# Altium PCB SystemStatusBoard.PcbDoc
Units mm, origin at the board's own origin, x right, y up, seen from the top; angles counter-clockwise.
Board outline 78.99 x 52.2 mm, 2 copper layers (Top Layer, Bottom Layer); 67 components, 36 nets, 220 pads, 35 vias.
Unrouted connection lines stored in the file: 29.
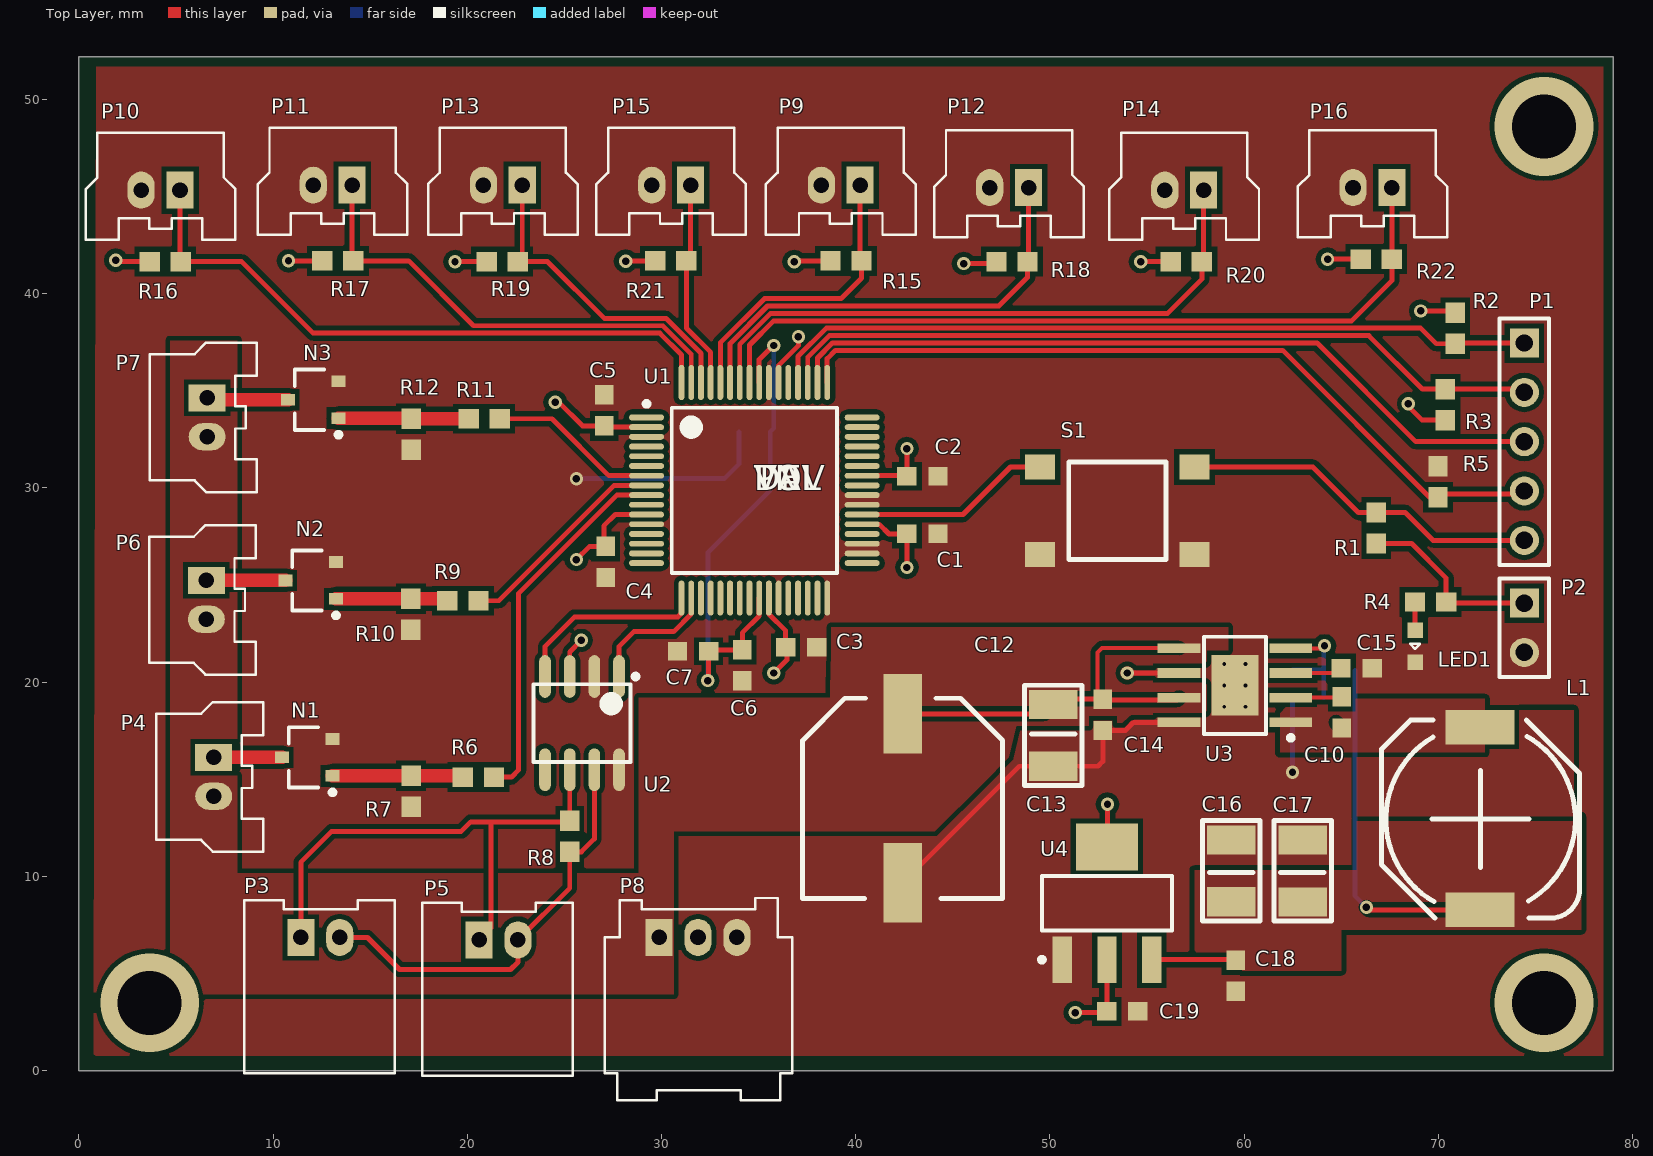
[diagram p0: Top Layer view]
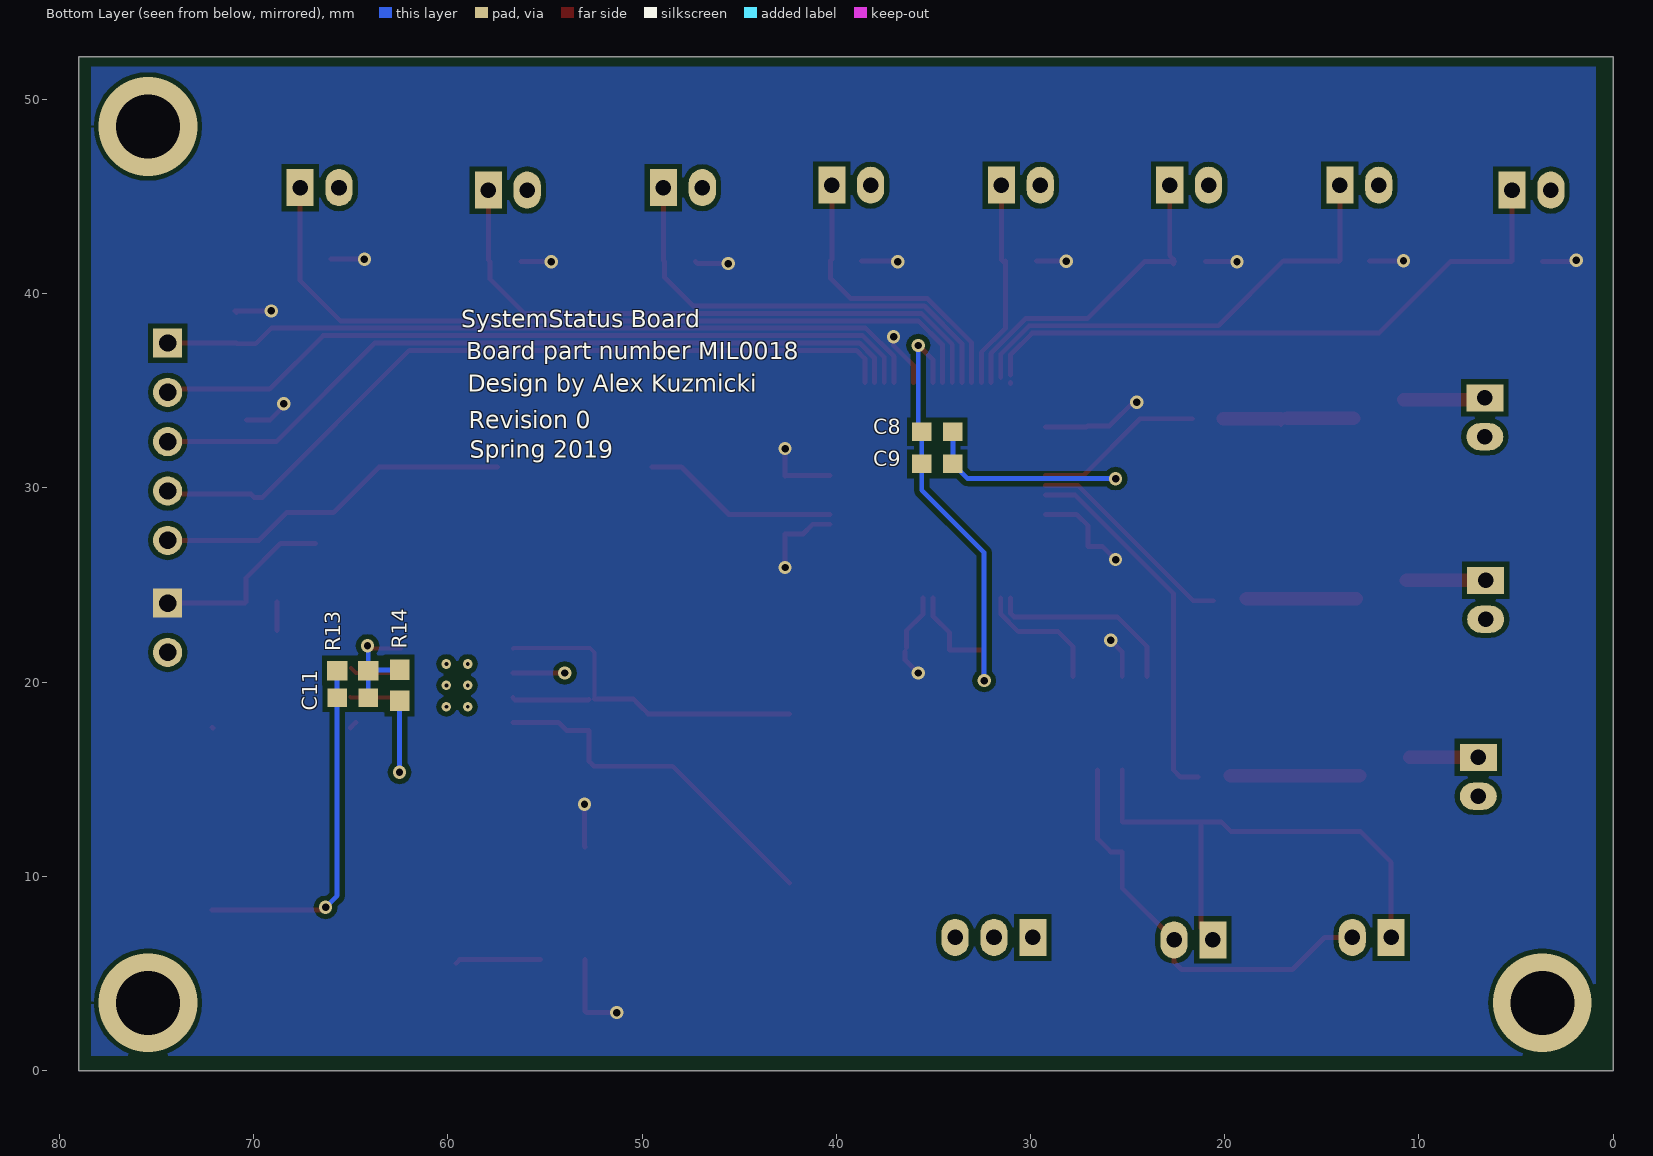
[diagram p1: Bottom Layer view, seen from below]

## Layer stack, top to bottom
Top Solder: solder mask 0.0102, Solder Resist, Dk 3.5
Top Layer: signal copper 0.0356
Dielectric 1: dielectric 0.32, FR-4, Dk 4.8
Bottom Layer: signal copper 0.0356
Bottom Solder: solder mask 0.0102, Solder Resist, Dk 3.5

## Board outline
0,0 78.994,0 78.994,52.197 0,52.197

## Design rules (kind name [scope] priority, off if disabled: settings)
Clearance [All] p1: gap=0.254 ignorepadtopadclearanceinfootprint=FALSE except(0: Arc-Hole Track-Hole SMDPad-Hole THPad-Hole Via-Hole Fill-Hole Poly-Hole Region-Hole Text-Hole; 0.127: Track-Track Track-SMDPad SMDPad-SMDPad; 0.178: Track-Via)
HoleSize [All] p1: absolutevalues=TRUE maxlimit=3.81 minlimit=0.254 maxpercent=80.000 minpercent=20.000
MinimumAnnularRing [All] p1: minimumring=0.178
MinimumSolderMaskSliver [All] p1: minsoldermaskwidth=0.025
PolygonConnect [All] p1: connectstyle=Direct reliefconductorwidth=0.254 reliefentries=4 polygonreliefangle="90 Angle" airgapwidth=0.254
RoutingVias [All] p1: holewidth=0.254 width=0.559 viastyle="Through Hole" minholewidth=0.254 minwidth=0.559 maxholewidth=2.54 maxwidth=3.81
SilkToSolderMaskClearance [IsPad] p1: minsilkscreentomaskgap=0.127 clearancetoexposedcopper=TRUE
SolderMaskExpansion [All] p1: expansion=0.102
Width [All] p1: maxlimit=3.81 minlimit=0.203 preferedwidth=0.254
27 further rules are at their usual default settings.

## Classes and differential pairs
component class SystemStatusBoard: C1 C2 C3 C4 C5 C6 C7 C8 C9 C18 C19 LED1 N1 N2 N3 P1 P2 P3 P4 P5 P6 P7 P8 P9 P10 P11 P12 P13 P14 P15 P16 R1 R2 R3 R4 R5 R6 R7 R8 R9 R10 R11 R12 R15 R16 R17 R18 R19 R20 R21 R22 S1 U1 U2 U4
component class 24Vto5Vat1A-R1: C10 C11 C12 C13 C14 C15 C16 C17 L1 R13 R14 U3

## Components (designator, comment, footprint, x,y, rotation, side; value= is the part's Value field where it differs from the comment)
C1 "Cap" CAPC0603 43.434,27.633 r0 top value=0.1uF
C2 "Cap" CAPC0603 43.434,30.607 r0 top value=0.1uF
C3 "Cap" CAPC0603 37.186,21.793 r0 top value=0.1uF
C4 "Cap" CAPC0603 27.116,26.194 r270 top value=0.1uF
C5 "Cap" CAPC0603 27.051,33.998 r90 top value=2.0uF
C6 "Cap" CAPC0603 34.163,20.866 r270 top value=0.1uF
C7 "Cap" CAPC0603 31.623,21.59 r180 top value=0.1uF
C8 "Cap" CAPC0603 34.798,32.893 r180 bottom value=1.0uF
C9 "Cap" CAPC0603 34.798,31.242 r180 bottom value=2.2uF
C10 "Cap" CAPC0603 65.022,18.442 r270 top value=470nF
C11 "Cap" CAPC0603 64.895,19.204 r180 bottom value=75pF
C12 "EEHZA1H101P" EEHZA1H101P 42.416,14.023 r0 top value=100uF
C13 "Cap" CAP1210 50.163,18.874 r90 top value=10uF
C14 "Cap" CAPC0603 52.723,18.315 r270 top value=100nF
C15 "Cap" CAPC0603 65.784,20.728 r0 top value=10uF
C16 "Cap" CAP1210 59.34,8.676 r270 top value=47uF
C17 "Cap" CAP1210 63.007,8.673 r270 top value=47uF
C18 "Cap" CAPC0603 59.57,4.881 r270 top value=1uF
C19 "Cap" CAPC0603 53.723,3.048 r0 top value=1uF
L1 "MSS1048-563MLB" MSS1048-563MLB 72.134,12.981 r0 top value=56uH
LED1 "LED" LED0603 68.796,21.844 r270 top
N1 "SSM3K329R,LF" SSM3K329R,LF 11.756,16.129 r180 top
N2 "SSM3K329R,LF" SSM3K329R,LF 11.938,25.241 r180 top
N3 "SSM3K329R,LF" SSM3K329R,LF 12.065,34.544 r180 top
P1 "Header 5" HDR1X5 74.422,37.465 r270 top
P2 "Header 2" HDR1X2 74.422,24.076 r270 top
P3 "2-pin Horz Sherlock" MOLEX-HDR-1X2-SHERLOCK-HORZ 11.43,6.858 r180 top
P4 "2-pin Vert Sherlock" MOLEX-HDR-1X2-SHERLOCK-VERT 6.944,16.129 r90 top
P5 "2-pin Horz Sherlock" MOLEX-HDR-1X2-SHERLOCK-HORZ 20.606,6.731 r180 top
P6 "2-pin Vert Sherlock" MOLEX-HDR-1X2-SHERLOCK-VERT 6.563,25.241 r90 top
P7 "2-pin Vert Sherlock" MOLEX-HDR-1X2-SHERLOCK-VERT 6.604,34.639 r90 top
P8 "3pos RA sherlock connector" MOLEX-HDR-1X3-SHERLOCK-RA 29.877,6.858 r180 top
P9 "2-pin Vert Sherlock" MOLEX-HDR-1X2-SHERLOCK-VERT 40.227,45.593 r0 top
P10 "2-pin Vert Sherlock" MOLEX-HDR-1X2-SHERLOCK-VERT 5.207,45.339 r0 top
P11 "2-pin Vert Sherlock" MOLEX-HDR-1X2-SHERLOCK-VERT 14.065,45.593 r0 top
P12 "2-pin Vert Sherlock" MOLEX-HDR-1X2-SHERLOCK-VERT 48.895,45.466 r0 top
P13 "2-pin Vert Sherlock" MOLEX-HDR-1X2-SHERLOCK-VERT 22.828,45.593 r0 top
P14 "2-pin Vert Sherlock" MOLEX-HDR-1X2-SHERLOCK-VERT 57.912,45.339 r0 top
P15 "2-pin Vert Sherlock" MOLEX-HDR-1X2-SHERLOCK-VERT 31.496,45.593 r0 top
P16 "2-pin Vert Sherlock" MOLEX-HDR-1X2-SHERLOCK-VERT 67.602,45.466 r0 top
R1 "Res" RES0603 66.802,27.94 r90 top value=10k
R2 "Res" RES0603 70.866,38.227 r270 top value=10k
R3 "Res" RES0603 70.358,34.29 r90 top value=10k
R4 "Res" RES0603 69.596,24.13 r180 top value=10k
R5 "Res" RES0603 69.977,30.319 r90 top value=10k
R6 "Res" RES0603 20.574,15.113 r0 top value=100
R7 "Res" RES0603 17.104,14.389 r270 top value=10k
R8 "Res" RES0603 25.273,12.065 r90 top value=120
R9 "Res" RES0603 19.774,24.196 r0 top value=100
R10 "Res" RES0603 17.094,23.495 r270 top value=10k
R11 "Res" RES0603 20.866,33.566 r0 top value=100
R12 "Res" RES0603 17.104,32.766 r270 top value=10k
R13 "Res" RES0603 64.895,20.601 r180 bottom value=40.2k
R14 "Res" RES0603 62.482,19.839 r270 bottom value=10k
R15 "Res" RES0603 39.497,41.694 r0 top value=1M
R16 "Res" RES0603 4.445,41.656 r0 top value=1M
R17 "Res" RES0603 13.335,41.694 r0 top value=1M
R18 "Res" RES0603 48.044,41.656 r0 top value=1M
R19 "Res" RES0603 21.793,41.656 r0 top value=1M
R20 "Res" RES0603 57.023,41.656 r0 top value=1M
R21 "Res" RES0603 30.48,41.694 r0 top value=1M
R22 "Res" RES0603 66.802,41.783 r0 top value=1M
S1 "Button" PTS645xxxxSMTR92 53.467,28.829 r0 top
U1 "TM4C123GH6PMT7R" PM0064A_N 34.778,29.883 r0 top value=Value
U2 "SN65HVD230DR" SOIC-8pin 25.908,17.894 r270 top
U3 "LMR23610ADDAR" LMR23610ADDAR 59.523,19.839 r180 top
U4 "TLV1117LV33DCYR" SOT23-4n 52.935,8.615 r90 top

## Footprints (in the part's own frame and the unit in brackets; to place one, negate y for a bottom-side part, rotate by r counter-clockwise, add the part's x,y. Pads: shape width x height; smd on the part's side, far side on the other; paste and mask are expansions set on the pad)
CAP1210 [mm]
  rect 1.5x2.5 smd: 1(-0.02,0) 2(-3.2,0)
  silkscreen extent -4.2,-1.48 0.97,1.48, body extent -3.22,-1.25 0,1.26, height 2.5
CAPC0603 [mm] "Chip Capacitor, 2-Leads, Body 1.60x0.80mm, IPC Medium Density"
  rect 1x0.95 smd: 1(-0.8,0) 2(0.8,0)
  body extent -0.88,-0.48 0.87,0.48, height 0.8
EEHZA1H101P [mm] "CAP ALUM POLY HYB 100UF 50V SMD"
  rect 2x4.1 smd: 1(0,4.35) 2(0,-4.35)
  silkscreen extent -5.15,-5.15 5.15,5.15, body extent -5.24,-5.99 5.25,5.99, height 10.54
HDR1X2 [mm] "Connector; Header; 2 Position"
  rect 1.5x1.5 hole 0.9: 1(0,0)
  round 1.5 hole 0.9: 2(2.54,0)
  silkscreen extent -1.27,-1.27 3.81,1.27
HDR1X5 [mm] "Connector; Header; 5 Position"
  rect 1.5x1.5 hole 0.9: 1(0,0)
  round 1.5 hole 0.9: 2(2.54,0) 3(5.08,0) 4(7.62,0) 5(10.16,0)
  silkscreen extent -1.27,-1.27 11.43,1.27
LED0603 [mm] "Chip LED, 2-Leads, Body 1.60x0.80mm, IPC Medium Density"
  rect 0.8x0.8 smd: A(-0.825,0) C(0.825,0)
  silkscreen extent -0.13,-0.25 0.12,0.25, body extent -0.88,-0.48 0.87,0.47, height 0.8
LMR23610ADDAR [mm] "IC REG BUCK ADJ 1A SYNC 8SOPWRPD"
  rect 2.2x0.5 smd: 1(-2.875,1.905) 2(-2.875,0.635) 3(-2.875,-0.635) 4(-2.875,-1.905) 5(2.875,-1.905) 6(2.875,-0.635) 7(2.875,0.635) 8(2.875,1.905)
  rect 2.4x3.1 smd: 9(0,0)
  silkscreen extent -3,-2.5 1.6,2.83, body extent -2,-2.5 2,2.5, height 1.7
MOLEX-HDR-1X2-SHERLOCK-HORZ [mm]
  rect 1.397x1.905 hole 0.8: 1(0,0)
  oval 1.397x1.905 hole 0.8: 2(-2,0)
  silkscreen extent -4.83,-1.91 2.92,6.98, body extent -4.83,-1.91 2.87,8.59, height 5.54
MOLEX-HDR-1X2-SHERLOCK-VERT [mm]
  rect 1.397x1.905 hole 0.8: 1(0,0)
  oval 1.397x1.905 hole 0.8: 2(-2,0)
  silkscreen extent -4.85,-2.55 2.85,2.95, body extent -4.87,-2.59 2.83,2.96, height 8.5
MOLEX-HDR-1X3-SHERLOCK-RA [mm]
  rect 1.397x1.905 hole 0.8: 1(0,0)
  oval 1.397x1.905 hole 0.8: 2(-2,0) 3(-4,0)
  silkscreen extent -6.86,-2.03 2.79,8.38, body extent -6.88,-1.99 2.82,8.51, height 5.75
MSS1048-563MLB [mm] "FIXED IND 56UH 1.7A 126 MOHM"
  rect 3.56x1.78 smd: 1(0,4.7) 2(0,-4.7)
  silkscreen extent -5.06,-5.13 5.14,5.07, body extent -5.1,-5.15 5.1,5.15, height 5
PM0064A_N [mm]
  oval 1.8x0.3 smd paste-0.102 mask+0.051: 1(-5.55,3.75) 2(-5.55,3.25) 3(-5.55,2.75) 4(-5.55,2.25) 5(-5.55,1.75) 6(-5.55,1.25) 7(-5.55,0.75) 8(-5.55,0.25) 9(-5.55,-0.25) 10(-5.55,-0.75) 11(-5.55,-1.25) 12(-5.55,-1.75) 13(-5.55,-2.25) 14(-5.55,-2.75) 15(-5.55,-3.25) 16(-5.55,-3.75) 33(5.55,-3.75) 34(5.55,-3.25) 35(5.55,-2.75) 36(5.55,-2.25) 37(5.55,-1.75) 38(5.55,-1.25) 39(5.55,-0.75) 40(5.55,-0.25) 41(5.55,0.25) 42(5.55,0.75) 43(5.55,1.25) 44(5.55,1.75) 45(5.55,2.25) 46(5.55,2.75) 47(5.55,3.25) 48(5.55,3.75)
  oval 0.3x1.8 smd paste-0.102 mask+0.051: 17(-3.75,-5.55) 18(-3.25,-5.55) 19(-2.75,-5.55) 20(-2.25,-5.55) 21(-1.75,-5.55) 22(-1.25,-5.55) 23(-0.75,-5.55) 24(-0.25,-5.55) 25(0.25,-5.55) 26(0.75,-5.55) 27(1.25,-5.55) 28(1.75,-5.55) 29(2.25,-5.55) 30(2.75,-5.55) 31(3.25,-5.55) 32(3.75,-5.55) 49(3.75,5.55) 50(3.25,5.55) 51(2.75,5.55) 52(2.25,5.55) 53(1.75,5.55) 54(1.25,5.55) 55(0.75,5.55) 56(0.25,5.55) 57(-0.25,5.55) 58(-0.75,5.55) 59(-1.25,5.55) 60(-1.75,5.55) 61(-2.25,5.55) 62(-2.75,5.55) 63(-3.25,5.55) 64(-3.75,5.55)
  silkscreen extent -5.67,-4.25 4.25,4.57, body extent 0,0 0.25,0.25, height 0.25
PTS645xxxxSMTR92 [mm] "PTS645 Series SMT 6 mm Tactile Switch"
  rect 1.555x1.3 smd: A(-3.975,2.25) A(3.975,2.25) B(-3.975,-2.25) B(3.975,-2.25)
  silkscreen extent -2.5,-2.5 2.5,2.5, body extent -3,-3 3,3, height 4.5
RES0603 [mm] "Chip Resistor, 2-Leads, Body 1.60x0.80mm, IPC Medium Density"
  rect 1.05x1 smd: 1(-0.8,0) 2(0.8,0)
  body extent -0.88,-0.48 0.87,0.47, height 0.8
SOIC-8pin [mm] "For 296-1345-1-ND"
  oval 2.2x0.6 smd: 1(-2.4,1.905) 2(-2.4,0.635) 3(-2.4,-0.635) 4(-2.4,-1.905) 5(2.4,-1.905) 6(2.4,-0.635) 7(2.4,0.635) 8(2.4,1.905)
  silkscreen extent -2.52,-2.5 2,2.88, body extent -2,-2.5 2,2.5, height 1.75
SOT23-4n [mm] "SOT223, 4-Leads, Body 6.50x7.00mm (avg), Pitch 2.30mm, IPC Medium Density"
  rect 2.4x1 smd: 1(-2.9,2.3) 2(-2.9,0) 3(-2.9,-2.3)
  rect 2.4x3.2 smd: 4(2.9,0)
  silkscreen extent -3.02,-3.35 1.4,3.47, body extent -1.85,-3.35 1.85,3.35, height 1.7
SSM3K329R,LF [mm] "MOSFET N CH 30V 3.5A 2-3Z1A"
  rect 0.7x0.6 smd: 1(-1.3,0.95) 2(-1.3,-0.95) 3(1.3,0)
  silkscreen extent -1.43,-1.55 0.95,1.92, body extent -0.95,-1.55 0.95,1.55, height 0.8

## Part data
C1 C2 C3 C4 C5 C6 C7 C8 C9 C10 C11 C13 C14 C15 C16 C17: Supplier Part Number 1=1276-1000-1-ND, Supplier 1=Digi-Key
C12: "CAP ALUM POLY HYB 100UF 50V SMD", Manufacturer 1=Panasonic, Supplier Part Number 1=P15442CT-ND, Tolerance=20%, Voltage=50V, ComponentLink1Description="Web Site", ComponentLink1URL=https://na.industrial.panasonic.com/products/capacitors/aluminum-electrolytic-capacitors/conductive-polymer-hybrid-aluminum-electrolytic/series/za-high-temp-reflow/ABA0135/model/EEHZA1H101P, ComponentLink2Description="Data Sheet", ComponentLink2URL=https://industrial.panasonic.com/cdbs/www-data/pdf/RDD0000/ABA0000C1221.pdf, ComponentLink3Description="ZA Series Technical Data", ComponentLink3URL=https://industrial.panasonic.com/cdbs/www-data/pdf/RDD0000/ABA0000COS44.pdf, Manufacturer Part Number 1=EEHZA1H101P, Supplier 1=Digi-Key
C18 C19: Manufacturer Part Number=C0603C105K8PACTU, Supplier Part Number 1=399-3118-1-ND, Supplier 1=Digi-Key
L1: "FIXED IND 56UH 1.7A 126 MOHM", Manufacturer 1=Coilcraft, ComponentLink1Description="Web Site", ComponentLink1URL=https://www.coilcraft.com/mss1048.cfm, Manufacturer Part Number 1=MSS1048-563MLB, Supplier 1=Coilcraft, Supplier Part Number 1=MSS1048-563MLB
LED1: Color=Red, Supplier Part Number 1=754-1122-1-ND, Supplier 1=Digi-Key
N1 N2 N3: "MOSFET N CH 30V 3.5A 2-3Z1A", Manufacturer 1="Toshiba Semiconductor and Storage", Supplier Part Number 1=SSM3K329RLFTR-ND, Manufacturer Part Number 1=SSM3K329R,LF, Supplier 1=Digi-Key
P1: "Header, 5-Pin", LatestRevisionDate=17-Jul-2002, LatestRevisionNote="Re-released for DXP Platform.", Publisher="Altium Limited"
P2: "Header, 2-Pin", LatestRevisionDate=17-Jul-2002, LatestRevisionNote="Re-released for DXP Platform.", Publisher="Altium Limited"
P3 P5: library part MOLEX-HDR-1x2-SHERLOCK_RA, "Header, Molex, 2mm Pitch Sherlock Header, Single Row, Horizontal, 2 Circuits, Length 3.3mm,  0353630260", Manufacturer="Molex Inc", Manufacturer Part Number=0353630260, Supplier Part Number 1=WM18931-ND, Supplier 1=Digi-Key
P4 P6 P7 P9 P10 P11 P12 P13 P14 P15 P16: library part MOLEX-HDR-1x2-SHERLOCK_VERT, "Header, Molex, 2mm Pitch Sherlock Header, Single Row, Vertical, 2 Circuits, Length 3.3mm, 0353620250"
P8: library part MOLEX-HDR-1x3-SHERLOCK_RA, "Header, Molex, 2mm Pitch Sherlock Header, Single Row, Right Angle 3 Circuits, Length 3.3mm", Manufacturer="Molex Connector Corporation", Manufacturer Part Number=35363-0360, Supplier Part Number 1=WM18932-ND, Supplier 1=Digi-Key
R1 R2 R3 R4 R5 R6 R7 R8 R9 R10 R11 R12 R13 R14 R15 R16 R17 R18 R19 R20 R21 R22: Supplier Part Number 1=RMCF0603JT10K0CT-ND, Supplier 1=Digi-Key
S1: "SPST Button", Supplier Part Number 1=CKN9087CT-ND, Supplier 1=Digi-Key
U1: "Imported", Alternate_PartNumber=TM4C123GH6PMT, Manufacturer="Texas Instruments", PartNumber=TM4C123GH6PMTR, CompType=IC, MountType=SMT, PackageReference=PM0064A, PIN_COUNT=64, RefDes=RefDes, RoHS=Y, TYPE=TYPE
U2: "IC TXRX CAN 1MBPS 3.3V 8SOIC", Supplier Part Numbe 1=296-11654-1-ND, Supplier 1=Digi-Key
U3: "IC REG BUCK ADJ 1A SYNC 8SOPWRPD", Manufacturer 1="Texas Instruments", Supplier Part Number 1=296-47267-1-ND, ComponentLink1Description=Datasheet, ComponentLink1URL=http://www.ti.com/lit/ds/symlink/lmr23610.pdf, ComponentLink2Description="Web Site", ComponentLink2URL=http://www.ti.com/product/LMR23610/description, Manufacturer Part Number 1=LMR23610ADDAR, Supplier 1=Digi-Key
U4: "IC REG LINEAR 3.3V 1A SOT223-4", Digi-Key Part Number=296-28778-1-ND

## Via types
v1: diameter 0.686, hole 0.381, Top Layer to Bottom Layer, 26 vias
v2: diameter 0.5, hole 0.2, Top Layer to Bottom Layer, 6 vias
v3: diameter 5.08, hole 3.302, Top Layer to Bottom Layer, 3 vias

## Nets (pads, with @x,y where several pads share a name; then routed paths per layer and width w, separated by ;. In a path a pad name is that pad's centre, name@x,y a point inside that pad or via, vN(x,y) a via of type N, cw(c..) or ccw(c..) an arc to the next point about the centre after c; other vN are vias at no path point)
CAN1_RX: U1.17 U2.4 | length 10.1
  Top Layer w0.254: U2.4 24.003,21.844 25.527,23.368 30.846,23.368 31.028,23.55 U1.17
CAN1_TX: U1.18 U2.1 | length 6.8
  Top Layer w0.254: U2.1 27.813,21.844 28.575,22.606 30.622,22.606 31.528,23.512 U1.18
GND: C1.2 C2.2 C3.2 C4.2 C5.2 C6.2 C7.2 C8.2 C9.2 C12.2 C13.2 C14.2 C15.2 C16.2 C17.2 C18.2 C19.2 LED1.C N1.2 N2.2 N3.2 P2.2 P8.3 P9.2 P10.2 P11.2 P12.2 P13.2 P14.2 P15.2 P16.2 R5.2 R7.2 R10.2 R12.2 R14.2 S1.B U1.3 U1.12 U1.27 U1.32 U1.34 U1.35 U1.39 U1.40 U1.55 U2.2 U2.8 U3.6 U3.8 U3.9 U4.1 | length 35.3
  Top Layer w0.254: C12.2 48.417,15.674 C13.2 52.474,15.674 52.723,15.923 C14.2 53.884,17.515 54.303,17.934 U3.8 ; v1(53.973,20.474) U3.6
  Bottom Layer w0.254: v1(25.617,30.48) 33.236,30.48 C9.2 C8.2 ; R14.2 62.482,15.369 v1(62.484,15.367)
  other v2: 58.973,18.739 60.073,18.739 58.973,19.839 60.073,19.839 58.973,20.939 60.073,20.939
Leak0: P10.1 R16.2 U1.64 | length 32.6
  Top Layer w0.254: P10.1 5.207,41.694 R16.2 8.382,41.656 12.065,37.973 29.91,37.973 31.028,36.855 U1.64@31.028,35.809 ; U1.64@31.028,35.367 U1.64
Leak1: P11.1 R17.2 U1.63 | length 24.6
  Top Layer w0.254: P11.1 14.065,41.726 R17.2@14.135,41.656 ; R17.2 16.98,41.694 20.32,38.354 30.068,38.354 31.528,36.894 U1.63@31.528,35.687
Leak2: P13.1 R19.2 U1.62 | length 17
  Top Layer w0.254: R19.2 R19.2@22.644,41.656 ; R19.2@22.644,41.529 R19.2@22.644,41.656 ; P13.1 22.828,41.967 22.644,41.783 R19.2@22.644,41.656 ; U1.62 32.028,36.933 30.226,38.735 27.051,38.735 24.13,41.656 R19.2@22.644,41.656
Leak3: P15.1 R21.2 U1.61 | length 10.8
  Top Layer w0.254: R21.2 31.28,38.234 32.528,36.986 U1.61 ; R21.2@31.407,41.656 31.496,41.745 P15.1
Leak4: P9.1 R15.2 U1.60 | length 15.5
  Top Layer w0.254: U1.60 33.028,37.48 35.299,39.751 39.243,39.751 40.297,40.805 R15.2 40.227,41.764 P9.1
Leak5: P12.1 R18.2 U1.59 | length 23.4
  Top Layer w0.254: U1.59 33.528,37.442 35.456,39.37 47.371,39.37 48.844,40.843 R18.2 48.895,41.707 P12.1
Leak6: P14.1 R20.2 U1.58 | length 31.8
  Top Layer w0.254: U1.58 34.028,37.403 35.614,38.989 56.058,38.989 57.823,40.754 R20.2 57.912,41.745 P14.1
Leak7: P16.1 R22.2 U1.57 | length 41.2
  Top Layer w0.254: U1.57 34.528,37.364 35.772,38.608 65.532,38.608 67.602,40.678 R22.2 P16.1
LED_Pin0: R6.2 U1.9 | length 19.2
  Top Layer w0.254: R6.2 22.272,15.113 22.644,15.485 22.644,24.58 27.697,29.633 U1.9
LED_Pin1: R9.2 U1.8 | length 11.1
  Top Layer w0.254: R9.2 21.622,24.196 27.559,30.133 U1.8
LED_Pin2: R11.2 U1.7 | length 8.8
  Top Layer w0.254: R11.2 24.357,33.566 27.29,30.633 U1.7
NetC10_1: C10.1 U3.2 | length 2.6
  Top Layer w0.203: U3.2 64.984,19.204 C10.1
NetC10_2: C10.2 L1.1 U3.1 | length 0.5
  Top Layer w0.254: C10.2@64.73,17.934 C10.2 ; L1.1@72.095,17.642 L1.1
NetC11_2: C11.2 R13.2 R14.1 U3.4 | length 6.1
  Top Layer w0.203: U3.4 64.006,21.744 v1(64.133,21.871)
  Bottom Layer w0.254: R14.1 64.057,20.639 R13.2 ; C11.2 R13.2 ; v1(64.133,21.871) 64.095,21.833 R13.2
NetC15_1: C15.1 U3.3 | length 2.7
  Top Layer w0.203: U3.3 64.73,20.474 C15.1
NetLED1_A: LED1.A R4.2 | length 1.5
  Top Layer w0.254: LED1.A R4.2
NetN1_1: N1.1 R6.1 R7.1 | length 6.8
  Top Layer w0.254: R7.1@17.094,15.179 R7.1 ; R6.1@19.698,15.189 R6.1
  Top Layer w0.7: N1.1 R7.1@17.094,15.179 ; R7.1 R6.1@19.698,15.189
NetN1_3: N1.3 P4.1 | length 3.5
  Top Layer w0.7: P4.1 N1.3
NetN2_1: N2.1 R9.1 R10.1 | length 5.8
  Top Layer w0.254: R10.1@17.09,24.291 R10.1 ; R9.1@18.875,24.295 R9.1
  Top Layer w0.7: N2.1 R10.1@17.09,24.291 ; R10.1 R9.1@18.875,24.295
NetN2_3: N2.3 P6.1 | length 4.1
  Top Layer w0.7: P6.1 N2.3
NetN3_1: N3.1 R11.1 R12.1 | length 6.8
  Top Layer w0.254: R12.1@16.784,33.594 R12.1@17.104,33.274
  Top Layer w0.7: N3.1 R12.1@16.784,33.594 ; R12.1 R11.1
NetN3_3: N3.3 P7.1 | length 4.5
  Top Layer w0.7: P7.1@6.35,34.633 6.439,34.544 N3.3
NetP3_1: P3.1 P5.1 R8.2 U2.6 | length 27.6
  Top Layer w0.254: P3.1 11.43,10.731 13.018,12.319 19.685,12.319 20.176,12.81 21.209,12.81 ; P5.1 21.209,7.334 21.209,12.81 ; U2.6 R8.2 25.273,12.81 21.209,12.81
NetP3_2: P3.2 P5.2 R8.1 U2.7 | length 21.9
  Top Layer w0.254: P3.2 14.859,6.858 16.51,5.207 22.225,5.207 22.606,5.588 P5.2 25.273,9.398 R8.1 25.87,11.265 26.543,11.938 U2.7
RST_N: P1.5 R1.2 S1.A U1.38 | length 28.7
  Top Layer w0.254: U1.38 45.524,28.633 47.97,31.079 S1.A@49.492,31.079 ; S1.A@57.442,31.079 63.536,31.079 65.875,28.74 R1.2 68.288,28.74 69.723,27.305 P1.5
TCK/SWCLK: P1.1 R2.2 U1.52 | length 39.7
  Top Layer w0.254: U1.52 37.028,36.774 38.481,38.227 69.088,38.227 69.888,37.427 R2.2 70.904,37.465 P1.1
TDI: P1.3 U1.50 | length 40.1
  Top Layer w0.254: U1.50 38.028,36.696 38.797,37.465 63.754,37.465 68.834,32.385 P1.3
TDO/SWO: P1.4 R5.1 U1.49 | length 40.6
  Top Layer w0.254: U1.49 38.528,36.658 38.954,37.084 61.976,37.084 69.541,29.519 R5.1 70.138,29.68 74.257,29.68 P1.4
TMS/SWDIO: P1.2 R3.2 U1.51 | length 39.8
  Top Layer w0.254: U1.51 37.528,36.735 38.639,37.846 66.421,37.846 69.177,35.09 R3.2 74.257,35.09 P1.2@74.346,35.001
VDD: C1.1 C2.1 C3.1 C4.1 C5.1 C19.1 P2.1 R1.1 R2.1 R3.1 R4.1 R15.1 R16.1 R17.1 R18.1 R19.1 R20.1 R21.1 R22.1 U1.2 U1.11 U1.26 U1.37 U1.42 U1.54 U2.3 U4.2 U4.4 | length 61.6
  Top Layer w0.254: v1(1.905,41.726) 1.975,41.656 R16.1 ; v1(10.795,41.694) R17.1 ; v1(19.367,41.656) R19.1 ; v1(24.525,34.417) 24.709,34.417 25.928,33.198 C5.1 27.116,33.133 U1.2 ; U2.3 25.273,21.558 v1(25.871,22.156) ; v1(25.617,26.316) 26.295,26.994 27.033,26.994 27.033,28.049 27.617,28.633 U1.11 ; v1(28.157,41.683) 28.168,41.694 R21.1 ; U1.26 35.528,23.512 36.386,22.654 C3.1 ; v1(35.777,20.474) 36.449,21.146 C3.1@36.449,21.594 ; U1.54 36.028,36.313 37.047,37.332 v1(37.047,37.784) ; v1(36.83,41.656) 36.868,41.694 R15.1 ; U1.37 41.209,28.133 41.709,27.633 C1.1 v1(42.635,25.908) ; U1.42 42.608,30.633 C2.1 v1(42.635,32.031) ; v1(45.556,41.556) 47.144,41.556 R18.1 ; v1(51.308,2.99) 52.865,2.99 C19.1 52.935,3.06 U4.2 ; U4.4 52.959,11.539 v1(52.959,13.716) ; v1(54.673,41.656) R20.1 ; v1(64.293,41.783) R22.1 ; R1.1 68.618,27.14 70.396,25.362 R4.1 70.45,24.076 P2.1 ; v1(68.453,34.344) 68.453,34.201 69.164,33.49 R3.1 ; v1(69.095,39.117) 70.956,39.117 R2.1
VDDC: C6.1 C7.1 C8.1 C9.1 U1.25 U1.56 | length 27.2
  Top Layer w0.254: v1(32.385,20.085) 32.423,20.123 C7.1 32.499,21.666 C6.1 34.163,22.542 35.028,23.407 U1.25 ; U1.56 35.028,36.616 35.75,37.338 v1(35.777,37.338)
  Bottom Layer w0.254: v1(32.385,20.085) 32.385,26.67 35.598,29.883 C9.1 C8.1 35.777,33.072 v1(35.777,37.338)
Vin: C12.1 C13.1 C14.1 P4.2 P6.2 P7.2 P8.1 U3.5 U3.7 | length 21
  Top Layer w0.203: C14.1@52.449,19.141 52.449,21.536 52.683,21.77 56.621,21.77 U3.5
  Top Layer w0.254: C12.1 49.682,18.373 C13.1 50.45,19.141 C14.1@52.449,19.141 ; C14.1 52.749,19.088 56.532,19.088 U3.7
Vout: C11.1 C16.1 C17.1 C18.1 L1.2 R13.1 U4.3 | length 22.7
  Top Layer w0.254: U4.3 59.386,5.715 C18.1@59.57,5.531 ; v1(66.292,8.409) 66.42,8.281 L1.2
  Bottom Layer w0.254: R13.1 C11.1 65.695,9.006 v1(66.292,8.409)
pads on no net: P8.2 U1.1 U1.4 U1.5 U1.6 U1.10 U1.13 U1.14 U1.15 U1.16 U1.19 U1.20 U1.21 U1.22 U1.23 U1.24 U1.28 U1.29 U1.30 U1.31 U1.33 U1.36 U1.41 U1.43 U1.44 U1.45 U1.46 U1.47 U1.48 U1.53 U2.5
copper on no net:
  other v3: 3.645,3.492 75.435,3.492 75.435,48.615

## Polygon pours and split planes (outlines as drawn)
GND on Top Layer "GND_L01_P082" (solid, pour order 82): 0.767,0.762 78.486,0.762 78.486,51.689 0.891,51.689
Vout on Top Layer "Top Layer-Vout" (solid, pour order 74): 57.442,5.14 64.984,5.14 64.984,7.266 77.341,7.266 77.341,13.108 65.784,13.108 65.784,10.314 57.442,10.314 57.442,7.266 58.169,7.266 57.442,7.266
Vin on Top Layer "Top Layer-Vin" (solid, pour order 66): 4.713,3.937 30.622,3.937 30.622,12.319 44.069,12.319 46.527,14.777 47.886,16.136 48.26,17.768 59.182,17.768 59.182,22.825 38.745,22.825 38.689,19.204 28.829,19.204 28.829,10.16 8.142,10.16 8.142,37.592 4.713,37.592
no net on Top Layer "NONET_L01_P056" (solid, pour order 56): 61.085,18.569 61.085,17.426 64.006,17.426 64.006,16.918 65.403,16.918 65.784,16.537 65.784,13.108 76.96,13.108 76.96,18.569
NetC10_2 on Top Layer "Top Layer-NetC10_2" (solid, pour order 50): 72.388,16.383 61.847,16.383 61.847,18.415 62.573,19.141 72.388,19.141
no net on Top Layer "Top Layer-No Net" (solid, pour order 60): 47.564,17.681
VDD on Bottom Layer "Bottom Layer-VDD" (solid, pour order 78): 0.889,51.689 78.359,51.689 78.359,0.762 0.889,0.762
no net on Bottom Layer "Bottom Layer-No Net" (solid, pour order 80): 4.064,3.302

## Silkscreen, mask and mechanical layers (free items; w line width, h text height)
Bottom Overlay:
  text "SystemStatus Board" at 59.309,37.973 h1.52
  text "Board part number MIL0018" at 59.055,36.313 h1.52
  text "Design by Alex Kuzmicki" at 58.973,34.639 h1.52
  text "Revision 0" at 58.928,32.766 h1.52
  text "Spring 2019" at 58.864,31.242 h1.52
BO:
  the board outline again, w0.254

## Text inside footprints (layer, text, board x,y; h text height)
U1: Top Overlay "DEV" at 34.778,29.883 h1.27; Top Overlay "PN" at 34.778,29.883 h1.27; Top Overlay "VAL" at 34.778,29.883 h1.27; Top Overlay "TOL" at 34.778,29.883 h1.27